# EAGLE board pcb1d (EAGLE 9.6.2)
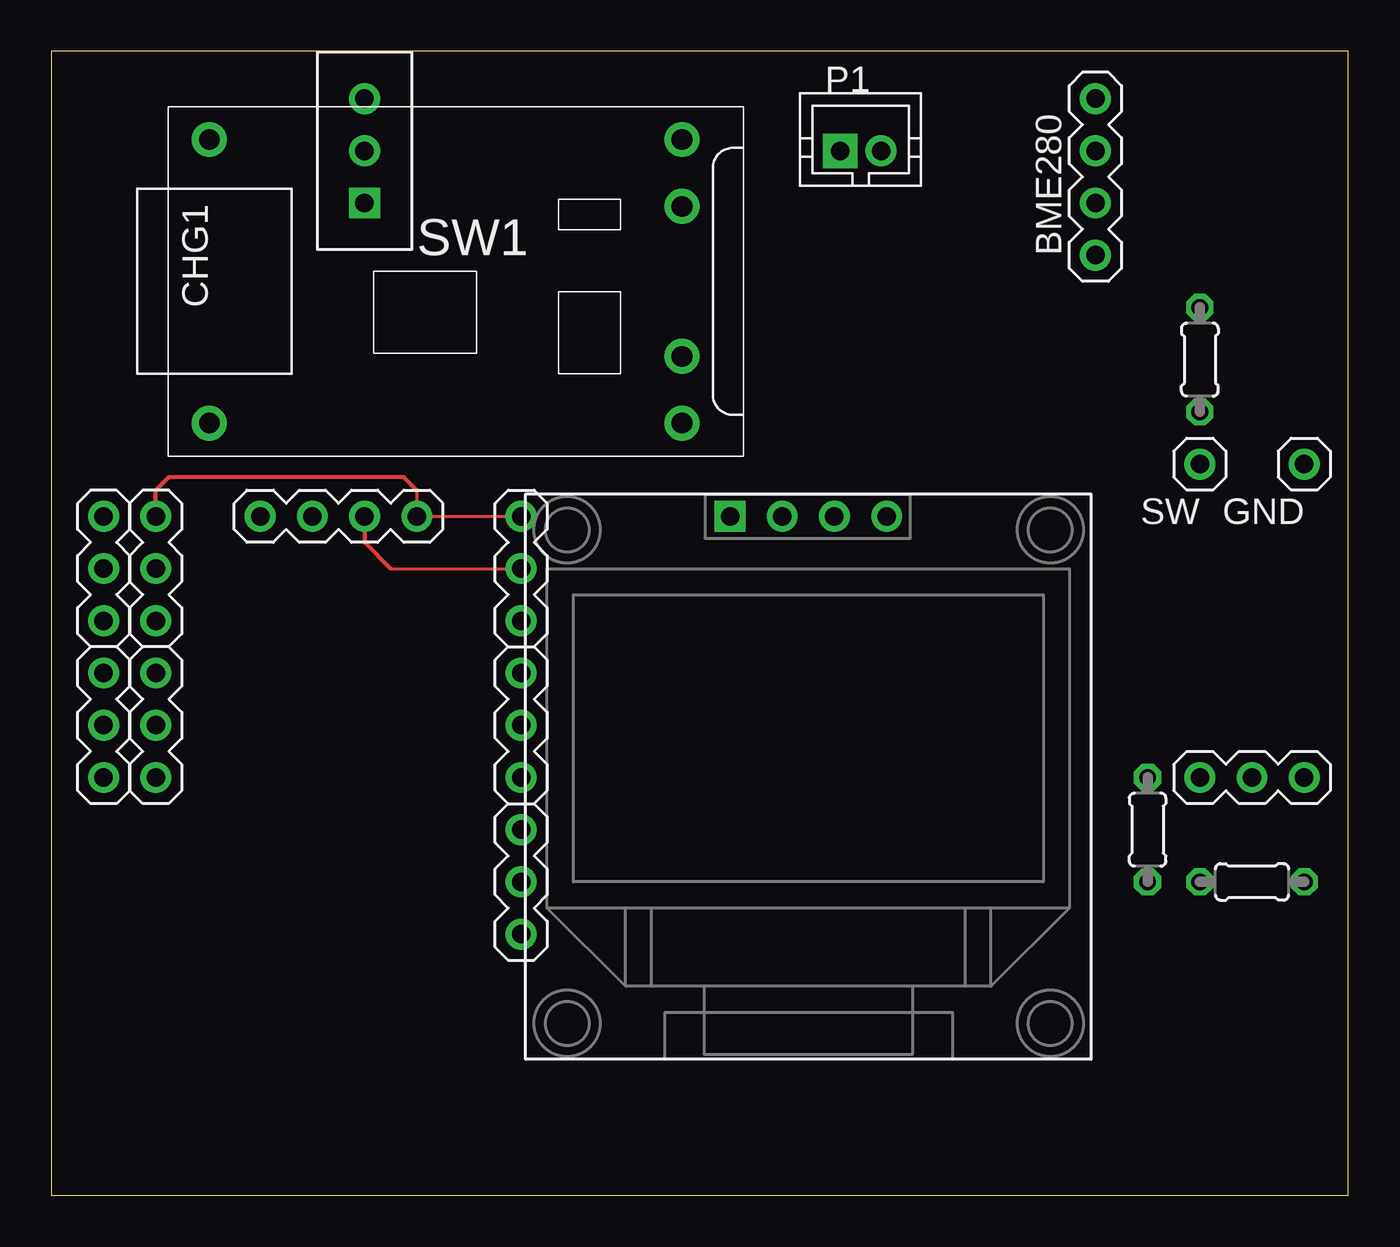
[diagram p0: board, top side]
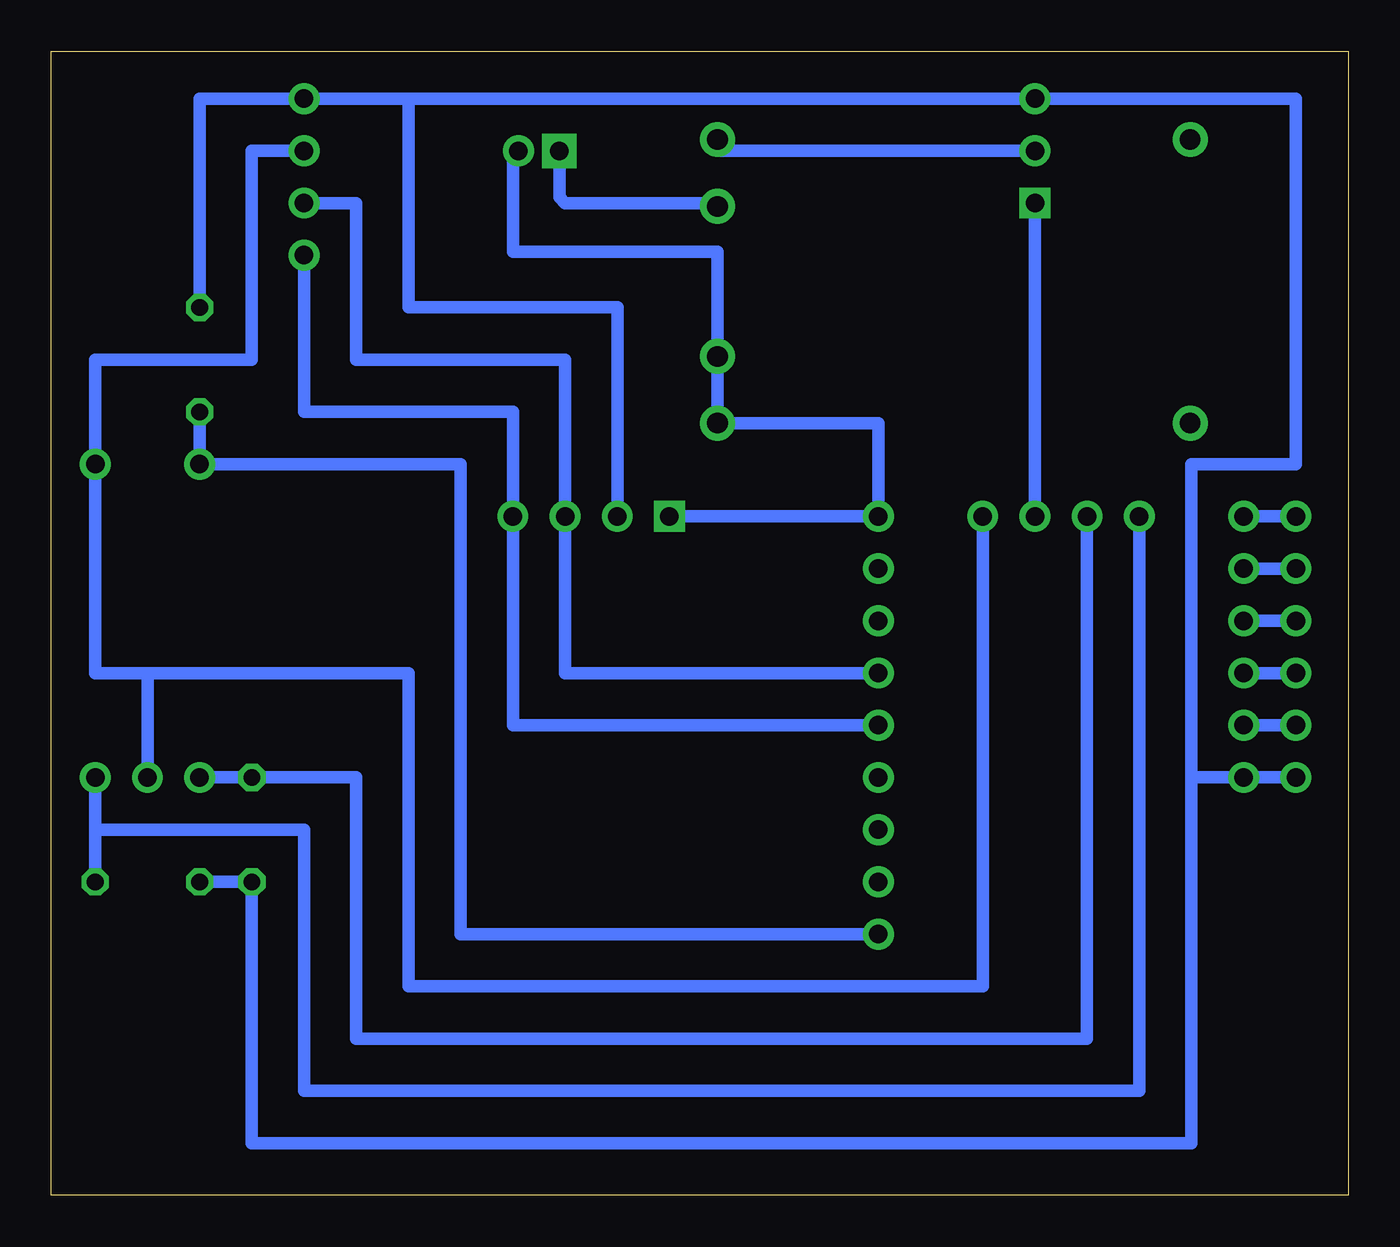
[diagram p1: board, bottom side, seen from below]

Size 63.09 x 55.63 mm. Coordinates in mm from the lower left corner, seen from the top.
Outline: 0,0 63.09,0 63.09,55.63 0,55.63 0,0
Copper layers (1*16): Top 0.035mm / dielectric 1.5mm / Bottom 0.035mm
Design rules "default": minimum track width 6mil, minimum drill 0.35mm, track to track 6mil, track to pad 6mil, pad to pad 6mil, via to via 6mil, smd to smd 6mil, copper to edge 40mil, drill to drill 6mil, minimum pad ring 10mil, minimum via ring 8mil, stop-mask expansion 4mil, vias tented up to drill 0mil, thermal gap 10mil

## Footprints (pad centres in the part's own frame; a part is rotated, then mirrored left to right if it is on the bottom)
PINHEAD-MA04-1 = drill 0.9 pad 1.5: 1 -3.81,0; 2 -1.27,0; 3 1.27,0; 4 3.81,0
TP4056MOD2-TYPE-C = drill 1 pad 1.7: BAT+ 11,3.65; BAT- 11,-3.65; IN+ -12,6.9; IN- -12,-6.9; OUT+ 11,6.9; OUT- 11,-6.9
PINHEAD-MA01-1 = drill 0.9 pad 1.5: 1 1.27,0
OLED-I2C-0.96 = drill 0.9 pad 1.5 square: GND -5.08,10.16 | drill 0.9 pad 1.5: SCL 0,10.16; SDA 2.54,10.16; VCC -2.54,10.16
JST-PH2 = drill 0.9 pad 1.676 square: 1 -1,0 | drill 0.9 pad 1.5: 2 1,0
0204/5 = drill 0.813 octagon: 1 -2.54,0; 2 2.54,0
PINHEAD-MA03-1 = drill 0.9 pad 1.5: 1 -1.27,0; 2 1.27,0; 3 3.81,0
SW3-1 = drill 0.9 pad 1.5 square: 1 -1.27,0 | drill 0.9 pad 1.5: 2 1.27,0; 3 3.81,0

## Placement (x,y rotation side)
BME280  [PINHEAD-MA04-1]  50.8,49.53 270 top
CHG1  [TP4056MOD2-TYPE-C]  19.68,44.45 0 top
GND  [PINHEAD-MA01-1]  59.69,35.56 0 top
OLED1  OLED-SSD1306-0.96  [OLED-I2C-0.96]  38.1,22.86 0 top
P1  [JST-PH2]  39.37,50.8 0 top
R1  10K  [0204/5]  55.88,40.64 90 top
R2  10K  [0204/5]  58.42,15.24 0 top
R3  10K  [0204/5]  53.34,17.78 90 top
SV3  [PINHEAD-MA04-1]  13.97,33.02 180 top
SV4  [PINHEAD-MA03-1]  22.86,29.21 90 top
SV5  [PINHEAD-MA03-1]  22.86,21.59 90 top
SV6  [PINHEAD-MA03-1]  22.86,13.97 90 top
SV7  [PINHEAD-MA03-1]  5.08,31.75 270 top
SV8  [PINHEAD-MA03-1]  5.08,24.13 270 top
SV9  [PINHEAD-MA03-1]  57.15,20.32 0 top
SV10  [PINHEAD-MA03-1]  2.54,31.75 270 top
SV11  [PINHEAD-MA03-1]  2.54,24.13 270 top
SW  [PINHEAD-MA01-1]  54.61,35.56 0 top
SW1  [SW3-1]  15.24,49.53 90 top

## Library data of the parts
BME280 SV3-SV11 = ytani1; OC_FARNELL: unknown; OC_NEWARK: unknown
CHG1 GND P1 SW = ytani1
OLED1 = ytani1; OC_AKIZUKI: P-12031; URL_AKIZUKI: https://akizukidenshi.com/catalog/g/gP-12031/
R1-R3 = rcl; SPICEPREFIX: R
SW1 = ytani1; MF: HiLetgo; URL_AMAZON: https://www.amazon.co.jp/gp/product/B01LYVYQNO/

## Nets
+3V3: BME280.1 OLED1.VCC R1.2 R2.1 R3.1 SV8.3 SV11.3 SW1.3
+4V: CHG1.OUT+ SW1.2
+5V: SV3.2 SV4.2 SW1.1
BAT+: CHG1.BAT+ P1.1
GND: BME280.2 CHG1.BAT- CHG1.OUT- GND.1 OLED1.GND P1.2 SV3.1 SV4.3 SV7.1 SV9.2 SV10.1
N$2: BME280.3 OLED1.SCL SV5.3
N$3: BME280.4 OLED1.SDA SV5.2
N$4: SV7.2 SV10.2
N$5: R1.1 SV6.1 SW.1
N$6: R3.2 SV3.3 SV9.1
N$7: SV7.3 SV10.3
N$8: SV8.1 SV11.1
N$9: SV8.2 SV11.2
N$11: R2.2 SV3.4 SV9.3

## Tracks (layer width: path | path; a pad name or v marks a point on that pad's centre or on a via)
+3V3
  Bottom 0.61: OLED1.VCC 35.56,43.18 45.72,43.18 45.72,53.34 | R2.1 R3.1 53.34,2.54 7.62,2.54 7.62,20.32 | 45.72,53.34 BME280.1 55.88,53.34 R1.2 | 7.62,20.32 7.62,35.56 2.54,35.56 2.54,53.34 SW1.3 45.72,53.34 | SV11.3 SV8.3 7.62,20.32
+4V
  Bottom 0.61: SW1.2 30.48,50.8 30.68,51.01 CHG1.OUT+
+5V
  Top 0.152: 16.51,30.48 SV4.2
  Top 0.2: SV3.2 15.24,31.75 16.51,30.48
  Bottom 0.61: SV3.2 SW1.1
BAT+
  Bottom 0.61: CHG1.BAT+ 30.84,48.26 38.1,48.26 38.37,48.53 P1.1
GND
  Top 0.152: 17.78,34.29 SV3.1 SV4.3
  Top 0.2: SV7.1 5.08,34.29 5.71,34.92 17.14,34.92 17.78,34.29
  Bottom 0.61: SV7.1 SV10.1 | OLED1.GND SV4.3 22.86,37.55 CHG1.OUT- CHG1.BAT- 30.68,45.88 40.64,45.88 40.64,50.53 P1.2 | SV9.2 58.42,25.4 | 58.42,25.4 60.96,25.4 GND.1 60.96,40.64 53.34,40.64 53.34,50.8 BME280.2 | 58.42,25.4 45.72,25.4 45.72,10.16 17.78,10.16 SV3.1
N$2
  Bottom 0.61: SV5.3 38.1,25.4 OLED1.SCL 38.1,40.64 48.26,40.64 48.26,48.26 BME280.3
N$3
  Bottom 0.61: SV5.2 40.64,22.86 OLED1.SDA 40.64,38.1 50.8,38.1 BME280.4
N$4
  Bottom 0.61: SV7.2 SV10.2
N$5
  Bottom 0.61: R1.1 SW.1 43.18,35.56 43.18,12.7 SV6.1
N$6
  Bottom 0.61: SV9.1 R3.2 48.26,20.32 48.26,7.62 12.7,7.62 SV3.3
N$7
  Bottom 0.61: SV7.3 SV10.3
N$8
  Bottom 0.61: SV8.1 SV11.1
N$9
  Bottom 0.61: SV8.2 SV11.2
N$11
  Bottom 0.61: SV3.4 10.16,5.08 50.8,5.08 50.8,17.78 60.96,17.78 | SV9.3 60.96,17.78 | 60.96,17.78 R2.2